# Altium PCB FCM_Integrated.PcbDoc (part 2 of 2)
Units mil, origin at the board's own origin, x right, y up, seen from the top; angles counter-clockwise.
Board outline 7020 x 5005 mil, 4 copper layers (Top Layer, Power, Ground, Bottom Layer), stack 23.756 mil thick; 143 components, 76 nets, 455 pads, 67 vias.
Unrouted connection lines stored in the file: 111.
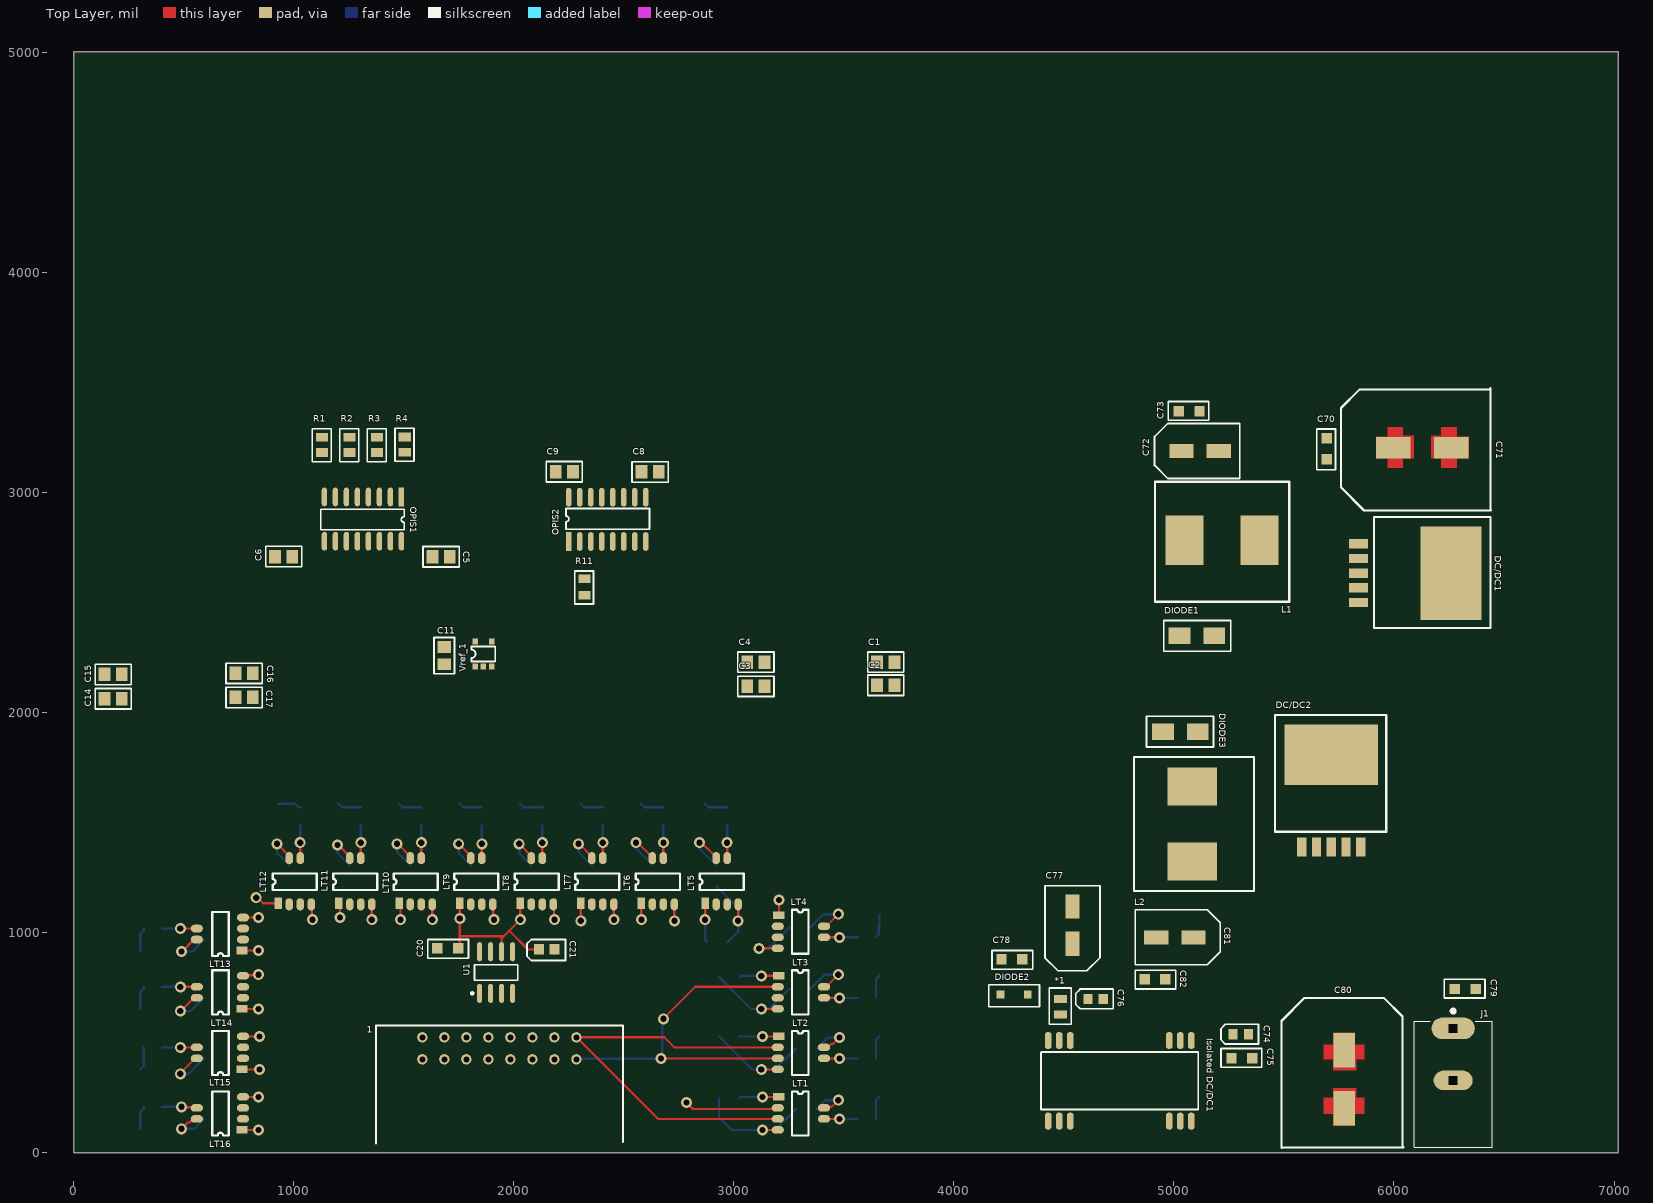
[diagram p0: Top Layer view]

## Via types
v1: diameter 50, hole 28, Top Layer to Bottom Layer, 67 vias

## Nets (pads, with @x,y where several pads share a name; then routed paths per layer and width w, separated by ;. In a path a pad name is that pad's centre, name@x,y a point inside that pad or via, vN(x,y) a via of type N, cw(c..) or ccw(c..) an arc to the next point about the centre after c; other vN are vias at no path point) (continued)
Net1_16: 1.16 LT16.3
Net*1_2: "Isolated DC/DC1.5" *1.2
NetDC/DC1_1: DC/DC1.1 DIODE1.K L1.1
NetDC/DC2_1: DC/DC2.1 DIODE3.K L2.1
NetLT1_6: LT1.6 R16.1 | length 153.7
  Top Layer w10: LT1.6 v1(3480,155)
  Bottom Layer w10: v1(3480,155) R16.1
NetLT2_6: LT2.6 R17.1 | length 153.7
  Top Layer w10: LT2.6 v1(3480,430)
  Bottom Layer w10: v1(3480,430) R17.1
NetLT3_6: LT3.6 R18.1 | length 153.7
  Top Layer w10: LT3.6 v1(3480,705)
  Bottom Layer w10: v1(3480,705) R18.1
NetLT4_6: LT4.6 R19.1 | length 153.7
  Top Layer w10: LT4.6 v1(3480,980)
  Bottom Layer w10: v1(3480,980) R19.1
NetLT5_6: LT5.6 R20.1 | length 158.7
  Top Layer w10: LT5.6 v1(2970,1410)
  Bottom Layer w10: v1@2970,1400 v1(2970,1410) R20.1
NetLT6_6: LT6.6 R21.1 | length 158.7
  Top Layer w10: LT6.6 v1(2680,1410)
  Bottom Layer w10: v1@2680,1400 v1(2680,1410) R21.1
NetLT7_6: LT7.6 R22.1 | length 158.7
  Top Layer w10: LT7.6 v1(2405,1410)
  Bottom Layer w10: v1@2405,1400 v1(2405,1410) R22.1
NetLT8_6: LT8.6 R23.1 | length 158.7
  Top Layer w10: LT8.6 v1(2130,1410)
  Bottom Layer w10: v1@2130,1400 v1(2130,1410) R23.1
NetLT9_6: LT9.6 R24.1 | length 148.7
  Top Layer w10: LT9.6 v1(1855,1405)
  Bottom Layer w10: v1(1855,1405) R24.1
NetLT10_6: LT10.6 R26.1 | length 158.7
  Top Layer w10: LT10.6 v1(1580,1410)
  Bottom Layer w10: v1@1580,1400 v1(1580,1410) R26.1
NetLT11_6: LT11.6 R28.1 | length 158.7
  Top Layer w10: LT11.6 v1(1305,1410)
  Bottom Layer w10: v1@1305,1400 v1(1305,1410) R28.1
NetLT12_6: LT12.6 R30.1 | length 158.7
  Top Layer w10: LT12.6 v1(1030,1410)
  Bottom Layer w10: v1@1030,1400 v1(1030,1410) R30.1
NetLT13_6: LT13.6 R25.1 | length 158.7
  Top Layer w10: v1(485,1020) LT13.6
  Bottom Layer w10: R25.1 v1(485,1020)
NetLT14_6: LT14.6 R27.1 | length 168.7
  Top Layer w10: v1(485,755) LT14.6
  Bottom Layer w10: R27.1 v1(485,755) v1@495,755
NetLT15_6: LT15.6 R29.1 | length 168.7
  Top Layer w10: v1(485,480) LT15.6
  Bottom Layer w10: R29.1 v1(485,480) v1@495,480
NetLT16_6: LT16.6 R31.1 | length 160.7
  Top Layer w10: v1(490,210) 492.5,207.5 557.5,207.5 LT16.6
  Bottom Layer w10: R31.1 v1(490,210)
NetR13_1: R13.1 R15.2 Vref_1.1
NetR13_2: R13.2 R14.1
V_Ref: ADC1.11 ADC2.11 C11.2 R14.2 Vref_1.5
pads on no net: "Isolated DC/DC1.6" "Isolated DC/DC1.7" "Isolated DC/DC1.8" "Isolated DC/DC1.9" "Isolated DC/DC1.10" "Isolated DC/DC1.11" "Isolated DC/DC1.12" ADC1.16 ADC2.16 OPIS2.3 OPIS2.4 OPIS2.5 OPIS2.6 OPIS2.7 OPIS2.8 OPIS2.11 OPIS2.12 OPIS2.13 U1.1 U1.5 U1.7 U1.8

## Polygon pours and split planes (outlines as drawn)
+3V3 on Power (split plane): 6999.9,20.1 4809.01,20.1 4809.01,2890 4808.71,2891.54 4807.84,2892.84 4806.54,2893.71 4805,2894.01 20.1,2894.01 20.1,4984.9 6999.9,4984.9
+5 on Power (split plane): 4800.99,20.1 20.1,20.1 20.1,2885.99 4800.99,2885.99
GND_L on Ground (split plane): 6999.9,20.1 4809.01,20.1 4809.01,2890 4808.71,2891.54 4807.84,2892.84 4806.54,2893.71 4805,2894.01 20.1,2894.01 20.1,4984.9 6999.9,4984.9
GND_H on Ground (split plane): 4800.99,20.1 20.1,20.1 20.1,2885.99 4800.99,2885.99

## Other copper
Power (plane layer: these items are gaps in the copper):
  lines w7.87: 0,2890 4805,2890 4805,8.94
Ground (plane layer: these items are gaps in the copper):
  lines w7.87: 0,2890 4805,2890 4805,8.94